# Altium PCB 传感.PcbDoc
Units mil, origin at the board's own origin, x right, y up, seen from the top; angles counter-clockwise.
Board outline 1620 x 735 mil, 2 copper layers (Top Layer, Bottom Layer); 8 components, 7 nets, 28 pads, 0 vias.
Unrouted connection lines stored in the file: 3.
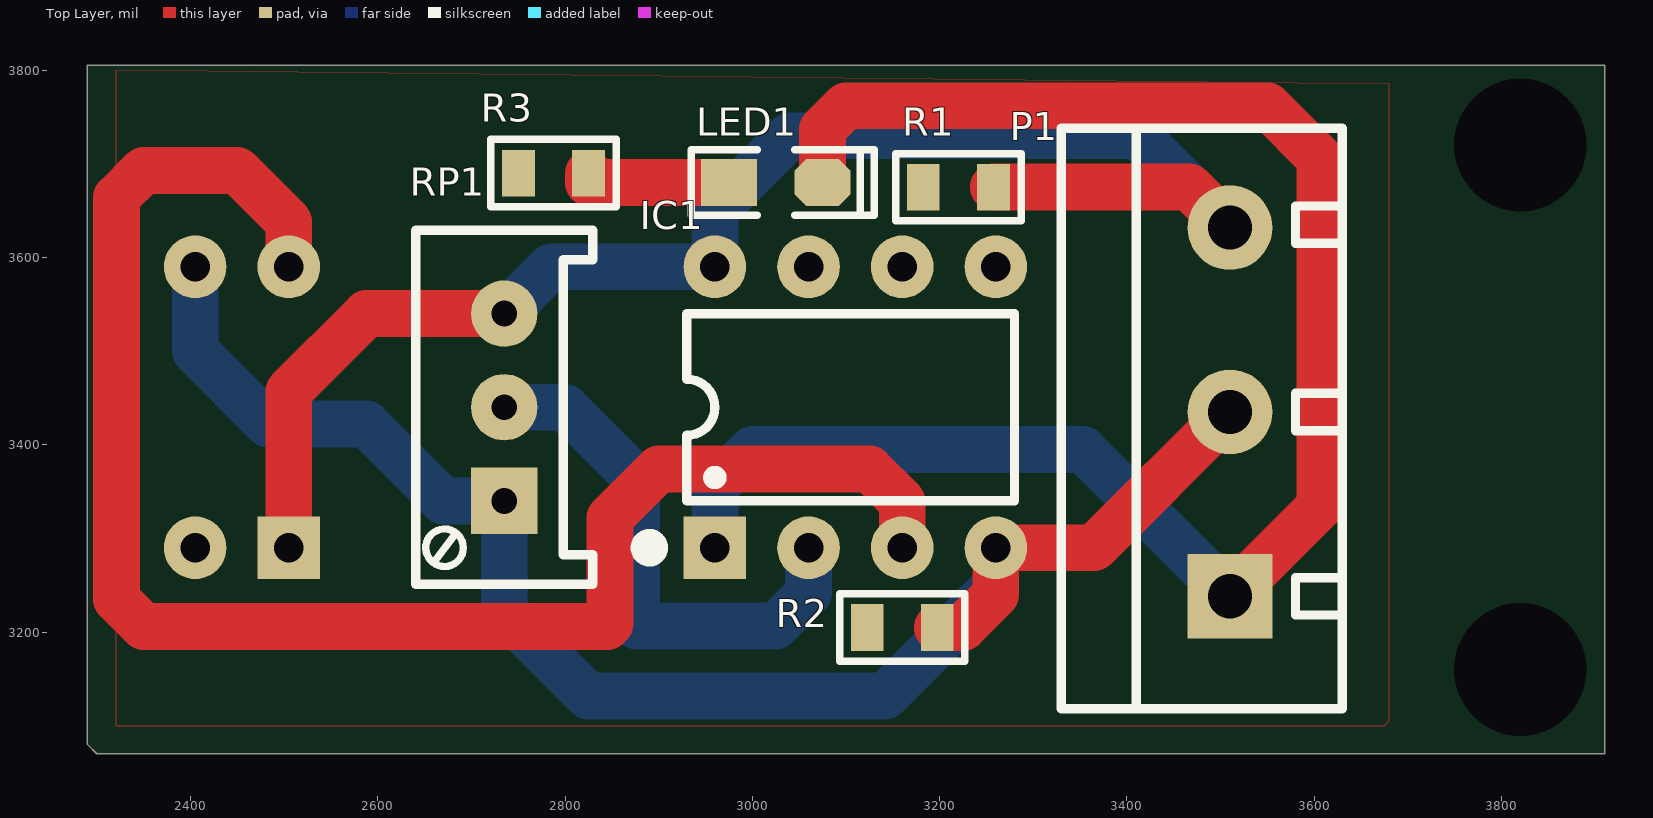
[diagram p0: Top Layer view]
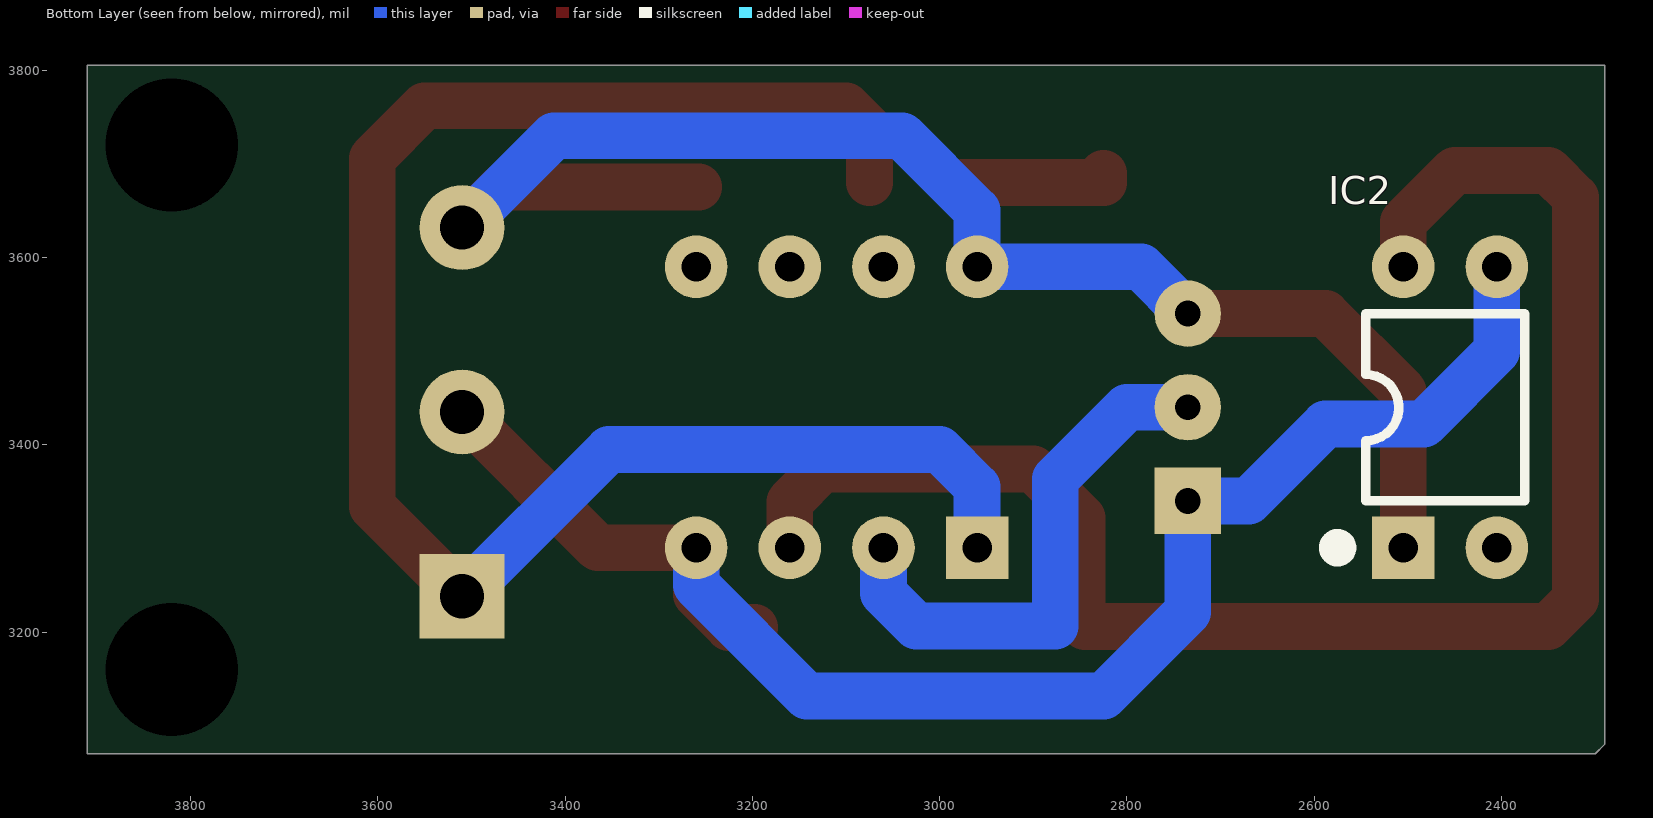
[diagram p1: Bottom Layer view, seen from below]

## Layer stack, top to bottom
Top Solder: solder mask 0.4, Solder Resist, Dk 3.5
Top Layer: signal copper 1.4
Dielectric 1: dielectric 12.6, FR-4, Dk 4.8
Bottom Layer: signal copper 1.4
Bottom Solder: solder mask 0.4, Solder Resist, Dk 3.5

## Board outline
2290,3080 2290,3805 3910,3805 3910,3070 2300,3070

## Design rules (kind name [scope] priority, off if disabled: settings)
Clearance [All] p1: gap=25 ignorepadtopadclearanceinfootprint=FALSE
PolygonConnect [All] p1: connectstyle=Relief reliefconductorwidth=10 reliefentries=4 polygonreliefangle="90 Angle" airgapwidth=10
RoutingVias [All] p1: holewidth=28 width=50 viastyle="Through Hole" minholewidth=28 minwidth=50 maxholewidth=28 maxwidth=50
SolderMaskExpansion [All] p1: expansion=4
Width [All] p1: maxlimit=80 minlimit=30 preferedwidth=50
30 further rules are at their usual default settings.

## Components (designator, comment, footprint, x,y, rotation, side; value= is the part's Value field where it differs from the comment)
IC1 "LM393" DIP8-300 3110,3440 r90 top
IC2 "817" DIP4-300 2455,3440 r90 bottom
LED1 "红色" "LED 0805R" 3025,3680 r0 top
P1 "HDR-1X3" KF301-5.0-3P 3510,3435 r90 top
R1 "10K" "R 0805_L" 3220,3675 r0 top
R2 "1K" "R 0805_L" 3160,3205 r180 top
R3 "1K" "R 0805_L" 2787.6,3690 r0 top
RP1 "1K" 3296W 2735,3440 r90 top

## Footprints (in the part's own frame and the unit in brackets; to place one, negate y for a bottom-side part, rotate by r counter-clockwise, add the part's x,y. Pads: shape width x height; smd on the part's side, far side on the other; paste and mask are expansions set on the pad)
3296W [mm] "Precise Multi-Winding Adjustable Resistor"
  rect 1.8x1.8 hole 0.7: 1(-2.54,0)
  round 1.8 hole 0.7: 2(0,0) 3(2.54,0)
  silkscreen extent -4.8,-2.4 4.8,2.4, body extent -4.75,-2.4 4.75,2.4, height 11.52
DIP4-300 [mm] "4.6*7.6*3.8(长宽高）"
  rect 1.7x1.7 hole 0.8: 1(-3.81,1.27)
  round 1.7 hole 0.8: 2(-3.81,-1.27) 3(3.81,-1.27) 4(3.81,1.27)
  silkscreen extent -4.06,-2.03 2.54,3.3, body extent -3.93,-2.29 3.94,2.29, height 4.5
DIP8-300 [mm] "9.4*7.6*3.8(长宽高）"
  rect 1.7x1.7 hole 0.8: 1(-3.81,3.81)
  round 1.7 hole 0.8: 2(-3.81,1.27) 3(-3.81,-1.27) 4(-3.81,-3.81) 5(3.81,-3.81) 6(3.81,-1.27) 7(3.81,1.27) 8(3.81,3.81)
  silkscreen extent -4.06,-4.32 2.54,5.84, body extent -3.93,-4.7 3.93,4.7, height 4.5
KF301-5.0-3P [mm] "可拼接端子/6A"
  rect 2.3x2.3 hole 1.2: 1(-5,0)
  round 2.3 hole 1.2: 2(0,0) 3(5,0)
  silkscreen extent -8.05,-3.05 7.7,4.57, body extent -7.87,-3 7.63,4.6, height 10.05
"LED 0805R" [mil] "红色0805LED                                       淘宝ID:黄晶宝石"
  rect 60x50 smd: 1(-50,0)
  oct 60x50 smd: 2(50,0)
  silkscreen extent -90,-35 105,35, body extent -39,-25 39,25, height 32
"R 0805_L" [mil] "1/8W贴片电阻"
  rect 35x50 smd: 1(-37.4,0) 2(37.4,0)
  silkscreen extent -67,-36 67,36, body extent -39,-25 39,25, height 20

## Part data
IC1: "双路电压比较"
IC2: "线性光耦"
LED1: library part LED-SMD, "贴片LED"
P1: library part "Header 3", "3P接插件"
R1 R2 R3: library part R, "贴片电阻"
RP1: library part RP, "单联电位器"

## Free pads (board coordinates)
  round 4 hole 141.73 unplated: 14(3820,3720) 15(3820,3160)

## Nets (pads, with @x,y where several pads share a name; then routed paths per layer and width w, separated by ;. In a path a pad name is that pad's centre, name@x,y a point inside that pad or via, vN(x,y) a via of type N, cw(c..) or ccw(c..) an arc to the next point about the centre after c; other vN are vias at no path point)
+5V: IC1.8 IC2.1 P1.3 R1.2 R3.1 RP1.3 | length 1631.9
  Top Layer w50: IC2.1 2505,3457 2588,3540 RP1.3 ; R1.2 3257.4,3675.39 3466.46,3675.39 P1.3
  Bottom Layer w50: RP1.3 2785,3590 IC1.8 2960,3650 3040,3730 3411.85,3730 P1.3
GND: IC1.4 IC2.3 P1.2 R2.1 RP1.1 | length 1693.2
  Top Layer w50: R2.1 3225,3205 3260,3240 IC1.4 3365,3290 P1.2
  Bottom Layer w50: IC2.3 2405,3500 2483,3422 2588,3422 2670,3340 RP1.1 2735,3221.53 2825,3131.53 3141.53,3131.53 3260,3250 IC1.4
NetIC1_2: IC1.2 RP1.2 | length 576.6
  Bottom Layer w50: RP1.2 2800,3440 2876.53,3363.47 2876.53,3206.53 3025,3206.53 3060,3241.53 IC1.2
NetIC1_3: IC1.3 IC2.4 R1.1 | length 1746.1
  Top Layer w50: IC2.4 2505,3638 2450,3693 2350,3693 2321,3664 2321,3235 2350,3206 2845,3206 2848,3209 2848,3322 2900,3374 3125,3374 3160,3339 IC1.3
NetIC2_2: IC2.2 R2.2
NetLED1_1: LED1.1 R3.2 | length 160
  Top Layer w50: R3.2 2825,3680 LED1.1
SIG: IC1.1 LED1.2 P1.1 | length 1825.7
  Top Layer w50: LED1.2 3075,3737 3100,3762 3550,3762 3606,3706 3606,3334.15 P1.1
  Bottom Layer w50: IC1.1 2960,3355 3000,3395 3353.15,3395 P1.1
pads on no net: IC1.5 IC1.6 IC1.7

## Polygon pours and split planes (outlines as drawn)
GND on Top Layer "Top Layer-GND" (solid, pour order 0): 2320,3800 2320,3100 3675,3100 3680,3105 3680,3785

## Silkscreen, mask and mechanical layers (free items; w line width, h text height)
Drill Drawing:
  lines w10: 2290,3080 2290,3261.25 2290,3623.75 2290,3805 3910,3805 3910,3070 2300,3070 2290,3080